# EAGLE board CAP-HOST (EAGLE 9.6.2)
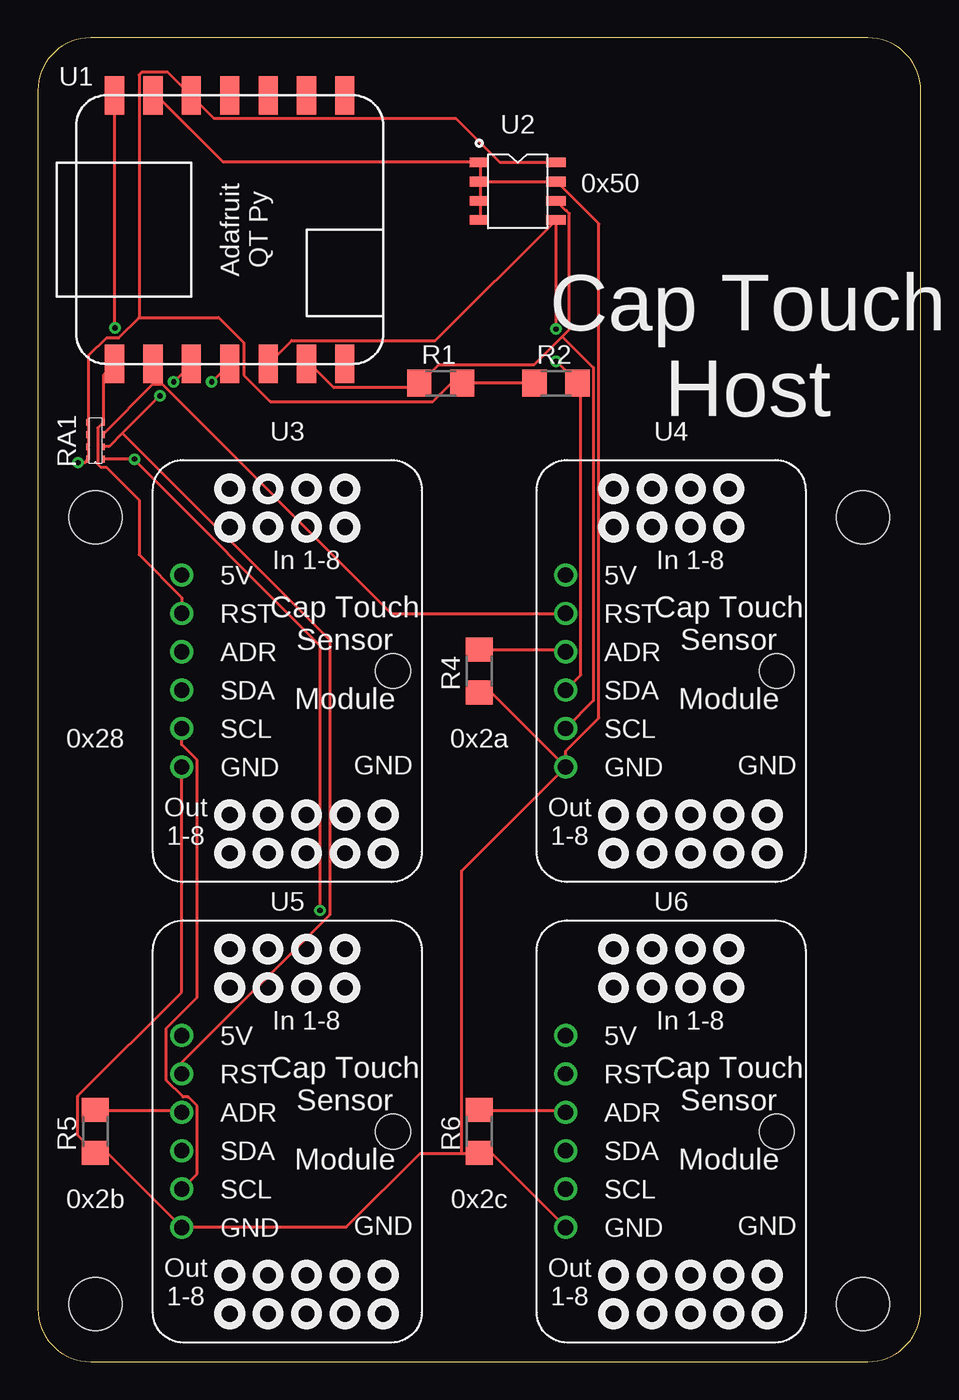
[diagram p0: board, top side]
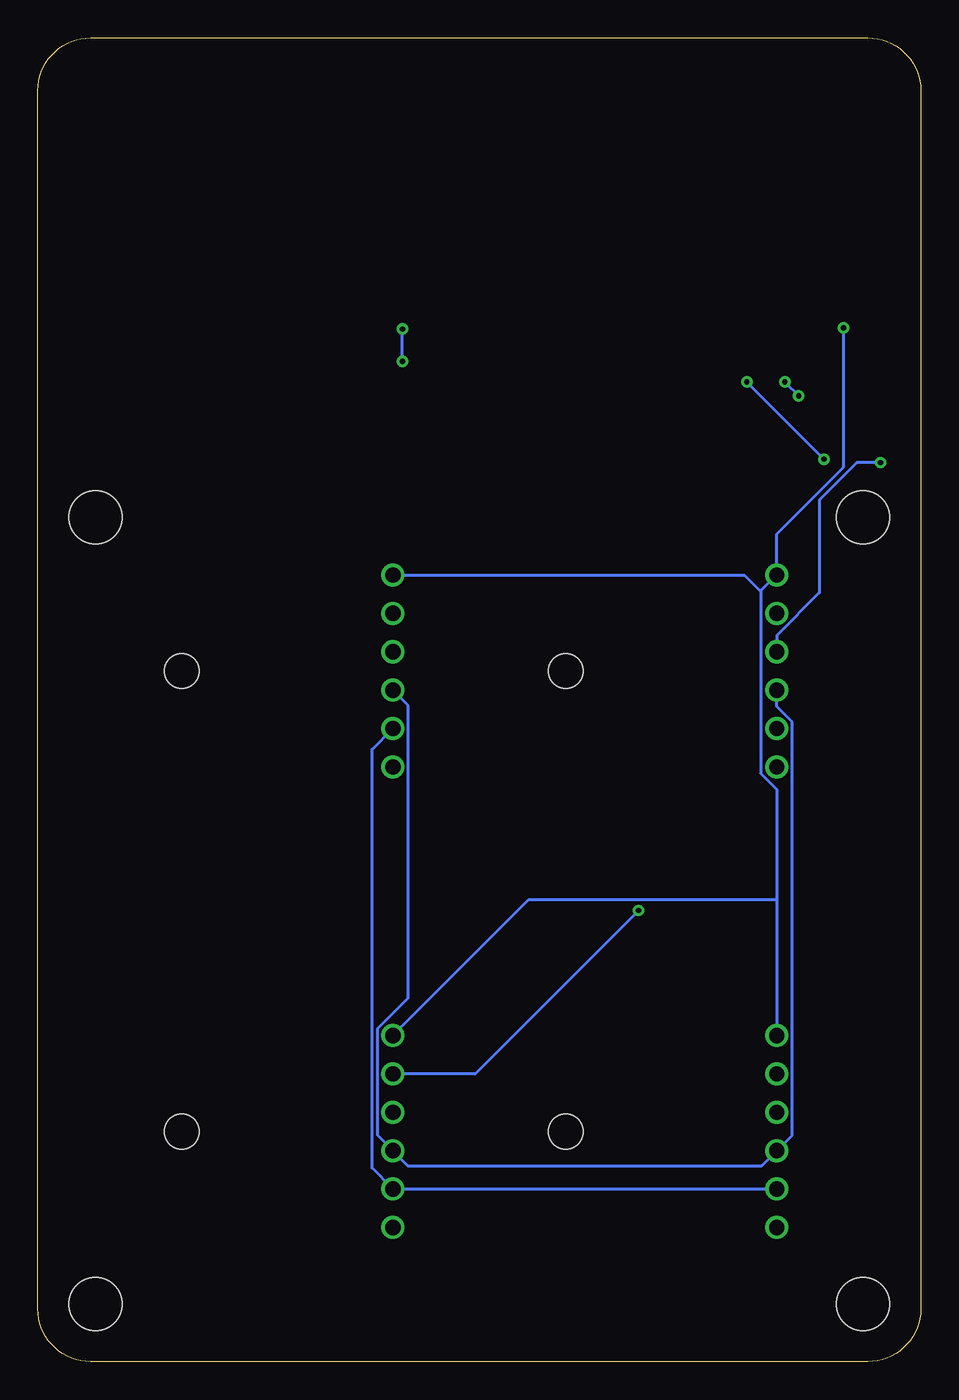
[diagram p1: board, bottom side, seen from below]

Size 58.42 x 87.63 mm. Coordinates in mm from the lower left corner, seen from the top.
Outline: 0,84.13 0,3.5 arc90 3.5,0 54.92,0 arc90 58.42,3.5 58.42,84.13 arc90 54.92,87.63 3.5,87.63 arc90 0,84.13
Copper layers (1*16): Top 0.035mm / dielectric 1.5mm / Bottom 0.035mm
Design rules "default": minimum track width 6mil, minimum drill 0.35mm, track to track 6mil, track to pad 6mil, pad to pad 6mil, via to via 6mil, smd to smd 6mil, copper to edge 40mil, drill to drill 6mil, minimum pad ring 10mil, minimum via ring 8mil, stop-mask expansion 4mil, vias tented up to drill 0mil, thermal gap 10mil
Net classes: 1 8 mil: width 0.203 mm
Holes 3.5 mm at 3.81,55.88 3.81,3.81 54.61,3.81 54.61,55.88

## Footprints (pad centres in the part's own frame; a part is rotated, then mirrored left to right if it is on the bottom)
R1206 = smd 1.6 x 1.803: 1 -1.422,0; 2 1.422,0
RES-NET-1206 = smd 0.437 x 0.203: 1 -1.219,-0.508; 2 -0.406,-0.508; 3 0.406,-0.508; 4 1.219,-0.508; 5 1.219,0.508; 6 0.406,0.508; 7 -0.406,0.508; 8 -1.219,0.508
QT_PY-CASTL = smd 2.54 x 1.27: 3V3 8.89,2.54; 5V 8.89,7.62; A0 -8.89,7.62; A1 -8.89,5.08; A2 -8.89,2.54; A3 -8.89,0; GND 8.89,5.08; MISO 8.89,-2.54; MOSI 8.89,0; RX 8.89,-7.62; SCL -8.89,-5.08; SCLK 8.89,-5.08; SDA -8.89,-2.54; TX -8.89,-7.62
SOIC-8-ON = smd 1.27 x 0.635: P$1 -2.54,1.905; P$2 -2.54,0.635; P$3 -2.54,-0.635; P$4 -2.54,-1.905; P$5 2.54,-1.905; P$6 2.54,-0.635; P$7 2.54,0.635; P$8 2.54,1.905
CAP-TOUCH-MODULE-2 = drill 1.016: ADR 1.905,15.24; GND 1.905,7.62; RST 1.905,17.78; SCL 1.905,10.16; SDA 1.905,12.7; VIN 1.905,20.32 | hole 2.3: 15.875,13.97

## Placement (x,y rotation side)
R1  3.6k  [R1206]  26.67,64.77 0 top
R2  3.6k  [R1206]  34.29,64.77 180 top
R4  120k  [R1206]  29.21,45.72 90 top
R5  100k  [R1206]  3.81,15.24 90 top
R6  82k  [R1206]  29.21,15.24 90 top
RA1  6.7k  [RES-NET-1206]  3.81,60.96 90 top
U1  QT Py #4600  [QT_PY-CASTL]  12.7,74.93 90 top
U2  CAT24C32-WI-GT3  [SOIC-8-ON]  31.75,77.47 0 top
U3  [CAP-TOUCH-MODULE-2]  7.62,31.75 0 top
U4  [CAP-TOUCH-MODULE-2]  33.02,31.75 0 top
U5  [CAP-TOUCH-MODULE-2]  7.62,1.27 0 top
U6  [CAP-TOUCH-MODULE-2]  33.02,1.27 0 top

## Library data of the parts
R1 R2 R4-R6 RA1 U1-U6 = home

## Nets
3V3 [8 mil]: R1.2 R2.2 RA1.5 RA1.6 RA1.7 RA1.8 U1.3V3 U2.P$8 U3.ADR
5V [8 mil]: U1.5V U3.VIN U4.VIN U5.VIN U6.VIN
GND [8 mil]: R4.1 R5.1 R6.1 U1.GND U2.P$1 U2.P$2 U2.P$3 U2.P$4 U2.P$7 U3.GND U4.GND U5.GND U6.GND
N$2 [8 mil]: R5.2 U5.ADR
N$4 [8 mil]: R6.2 U6.ADR
N$7 [8 mil]: R4.2 U4.ADR
RESET-1 [8 mil]: RA1.4 U1.A0 U3.RST
RESET-2 [8 mil]: RA1.3 U1.A1 U4.RST
RESET-3 [8 mil]: RA1.2 U1.A2 U5.RST
RESET-4 [8 mil]: RA1.1 U1.A3 U6.RST
SCL [8 mil]: R1.1 U1.SCL U2.P$6 U3.SCL U4.SCL U5.SCL U6.SCL
SDA [8 mil]: R2.1 U1.SDA U2.P$5 U3.SDA U4.SDA U5.SDA U6.SDA

## Tracks (layer width: path | path; a pad name or v marks a point on that pad's centre or on a via)
3V3  (via drill 0.35)
  Top 0.203: R2.2 R1.2 28.04,64.69 27.28,64.69 26.14,63.55 15.39,63.55 13.64,65.3 13.64,67.44 11.96,69.11 6.71,69.11 | 6.71,69.11 5.33,67.74 4.52,67.74 3.35,66.58 3.35,62.23 RA1.5 3.35,62.18 3.35,61.42 RA1.6 3.35,61.34 3.35,60.58 RA1.7 3.35,60.5 3.35,59.74 RA1.8 3.28,59.66 3.12,59.51 v2.67,59.51 | U2.P$8 34.29,79.4 30.56,79.4 27.66,82.3 11.66,82.3 10.21,83.74 U1.3V3 10.13,83.82 8.61,85.34 6.88,85.34 6.71,85.17 6.71,69.11
  Bottom 0.203: U3.ADR 9.53,48.08 6.71,50.9 6.71,57.04 4.23,59.51 v2.67,59.51
5V  (via drill 0.35)
  Top 0.203: v5.11,68.43 5.11,83.8 U1.5V
  Bottom 0.203: v5.11,68.43 5.11,59.21 9.53,54.79 U3.VIN 9.6,52.05 10.59,51.05 | 9.53,30.56 9.53,37.87 10.59,38.94 10.59,51.05 | 9.53,30.56 U5.VIN | U4.VIN 34.9,52.05 11.66,52.05 10.67,51.05 10.59,51.05 | 9.53,30.56 25.96,30.56 U6.VIN
GND
  Top 0.203: U2.P$4 29.26,75.59 29.26,76.81 U2.P$3 29.26,76.89 29.26,78.03 U2.P$2 | U2.P$2 29.26,78.11 29.26,79.32 U2.P$1 29.18,79.4 12.27,79.4 7.85,83.82 U1.GND | U2.P$2 U2.P$7 34.33,78.11 37.12,75.31 37.12,42.61 34.92,40.41 U4.GND | U4.GND 30.02,44.27 29.24,44.27 R4.1 | U6.GND 30.02,13.79 29.24,13.79 R6.1 29.18,13.79 28.04,13.79 | U3.GND 9.53,24.46 2.65,17.59 2.65,14.97 R5.1 3.84,13.79 4.62,13.79 U5.GND 9.55,8.91 20.42,8.91 25.3,13.79 28.04,13.79 | 28.04,13.79 28.04,32.49 U4.GND
N$2
  Top 0.203: R5.2 3.86,16.61 9.42,16.61 U5.ADR
N$4
  Top 0.203: U6.ADR 34.82,16.61 29.26,16.61 R6.2
N$7
  Top 0.203: U4.ADR 34.82,47.09 29.26,47.09 R4.2
RESET-1
  Top 0.203: U1.A0 4.34,65.3 4.34,62.2 RA1.4 4.32,62.15 3.96,61.8 3.96,59.42 4.17,59.21 4.54,59.21 6.71,57.04 6.71,53.42 9.53,50.6 U3.RST
RESET-2
  Top 0.203: U1.A1 7.62,64.69 | U4.RST 23.39,49.53 8.23,64.69 7.62,64.69 | 7.62,64.69 4.32,61.39 RA1.3
RESET-3  (via drill 0.35)
  Top 0.203: v8.08,63.93 5.6,61.45 | 5.6,61.45 4.72,60.58 4.34,60.58 RA1.2 | v8.99,64.85 10.13,65.99 U1.A2 | U5.RST 9.53,19.81 19.3,29.59 19.3,47.76 5.6,61.45
  Bottom 0.203: v8.99,64.85 v8.08,63.93
RESET-4  (via drill 0.35)
  Top 0.203: RA1.1 v6.4,59.74 6.4,59.66 18.67,47.4 v18.67,29.87 | U1.A3 v11.51,64.85
  Bottom 0.203: v11.51,64.85 v6.4,59.74 | U6.RST 29.49,19.05 v18.67,29.87
SCL
  Top 0.203: 34.71,67.86 32.84,65.99 26.52,65.99 25.3,64.77 R1.1 25.22,64.69 24.99,64.47 19.58,64.47 18.06,65.99 17.83,65.99 U1.SCL | U3.SCL 9.53,40.84 10.54,39.83 10.54,24.11 8.51,22.07 8.51,18.63 9.61,17.53 9.95,17.53 10.54,16.93 10.54,12.45 U5.SCL | 34.71,67.86 35.18,68.33 35.18,75.99 34.97,76.2 34.92,76.2 U2.P$6 | 34.71,67.86 36.77,65.8 36.77,43.75 U4.SCL
  Bottom 0.203: U5.SCL U6.SCL 34.92,11.46 36.3,12.83 36.3,40.54 U4.SCL
SDA  (via drill 0.35)
  Top 0.203: v34.29,68.35 U2.P$5 26.31,67.59 16.79,67.59 U1.SDA | v34.29,66.22 35.66,64.85 R2.1 35.94,64.54 35.94,45.47 U4.SDA
  Bottom 0.203: U3.SDA 9.53,43.36 8.51,42.34 8.51,14.99 U5.SDA 10.52,12.97 33.93,12.97 U6.SDA 35.94,14.99 35.94,22.05 33.91,24.08 33.91,43.43 U4.SDA | v34.29,66.22 v34.29,68.35

## Text on the board
tPlace: 0x50 | Cap Touch / Host | 0x28 | 0x2a | 0x2b | 0x2c